# Altium PCB BatteryBoard.PcbDoc
Units mil, origin at the board's own origin, x right, y up, seen from the top; angles counter-clockwise.
Board outline 3745 x 2520 mil, 2 copper layers (Top Layer, Bottom Layer); 15 components, 12 nets, 44 pads, 7 vias.
Unrouted connection lines stored in the file: 1.
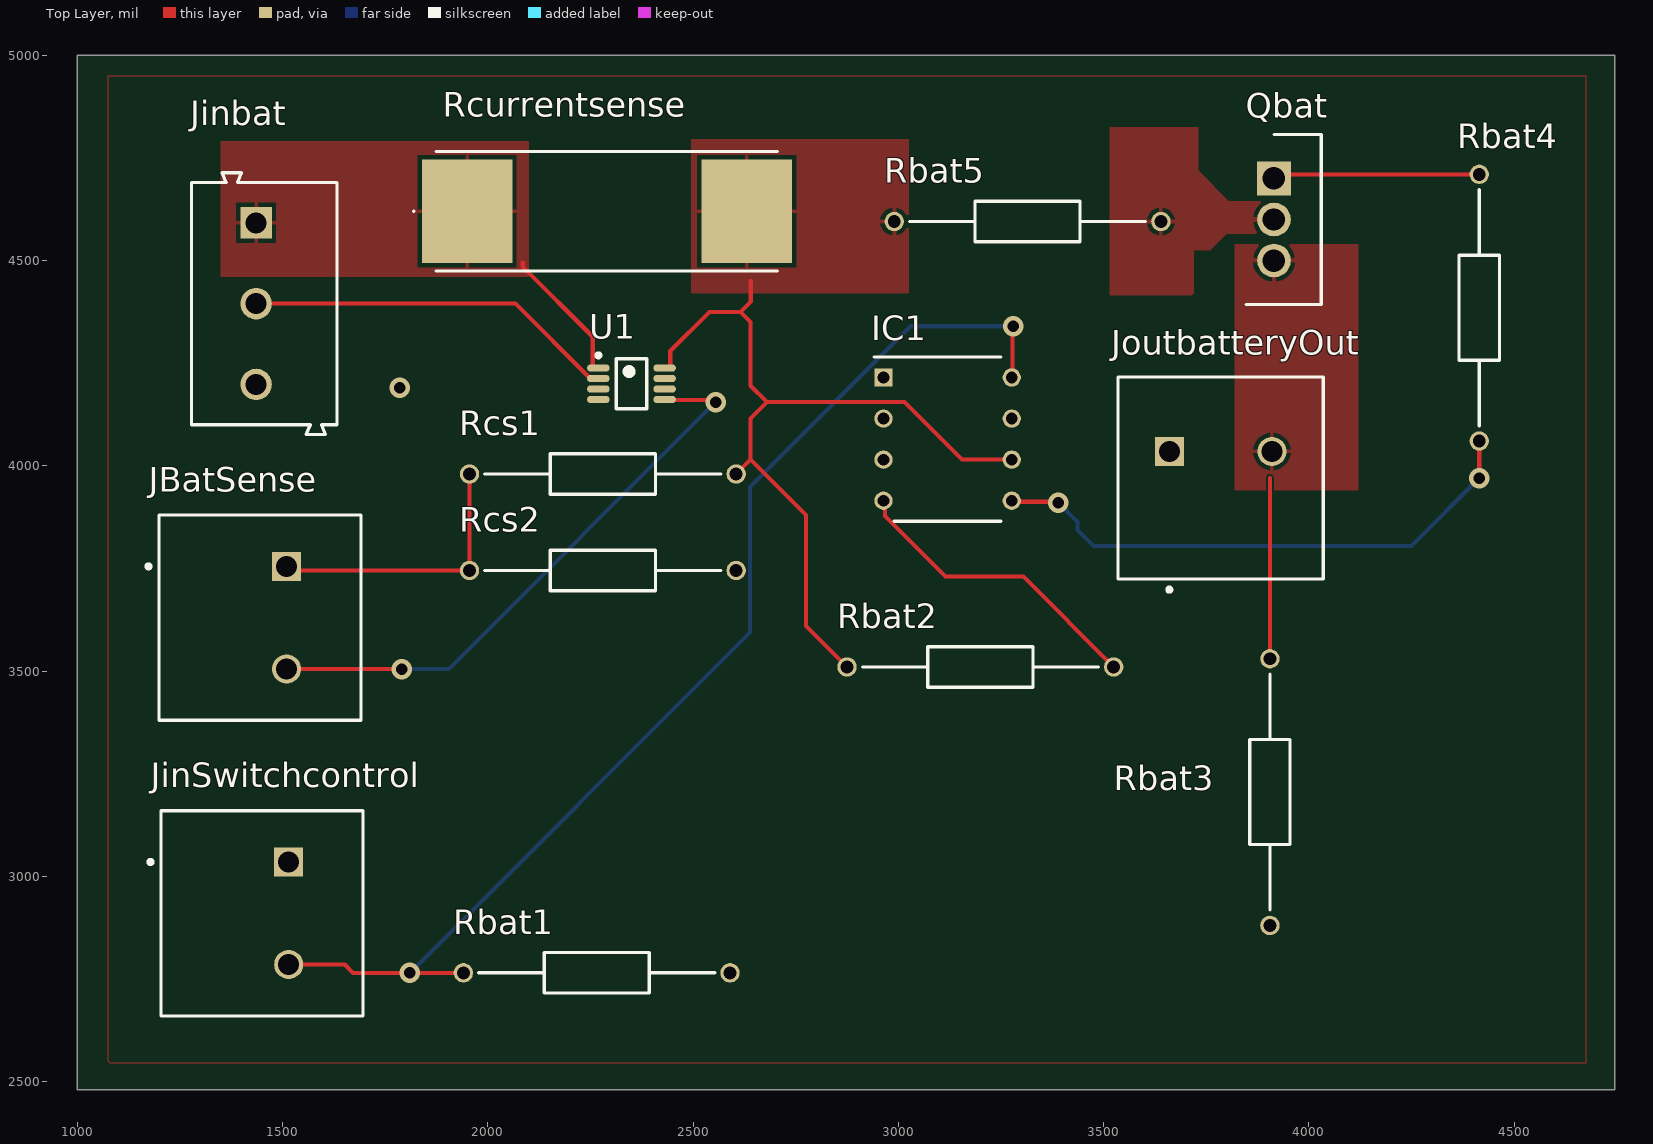
[diagram p0: Top Layer view]
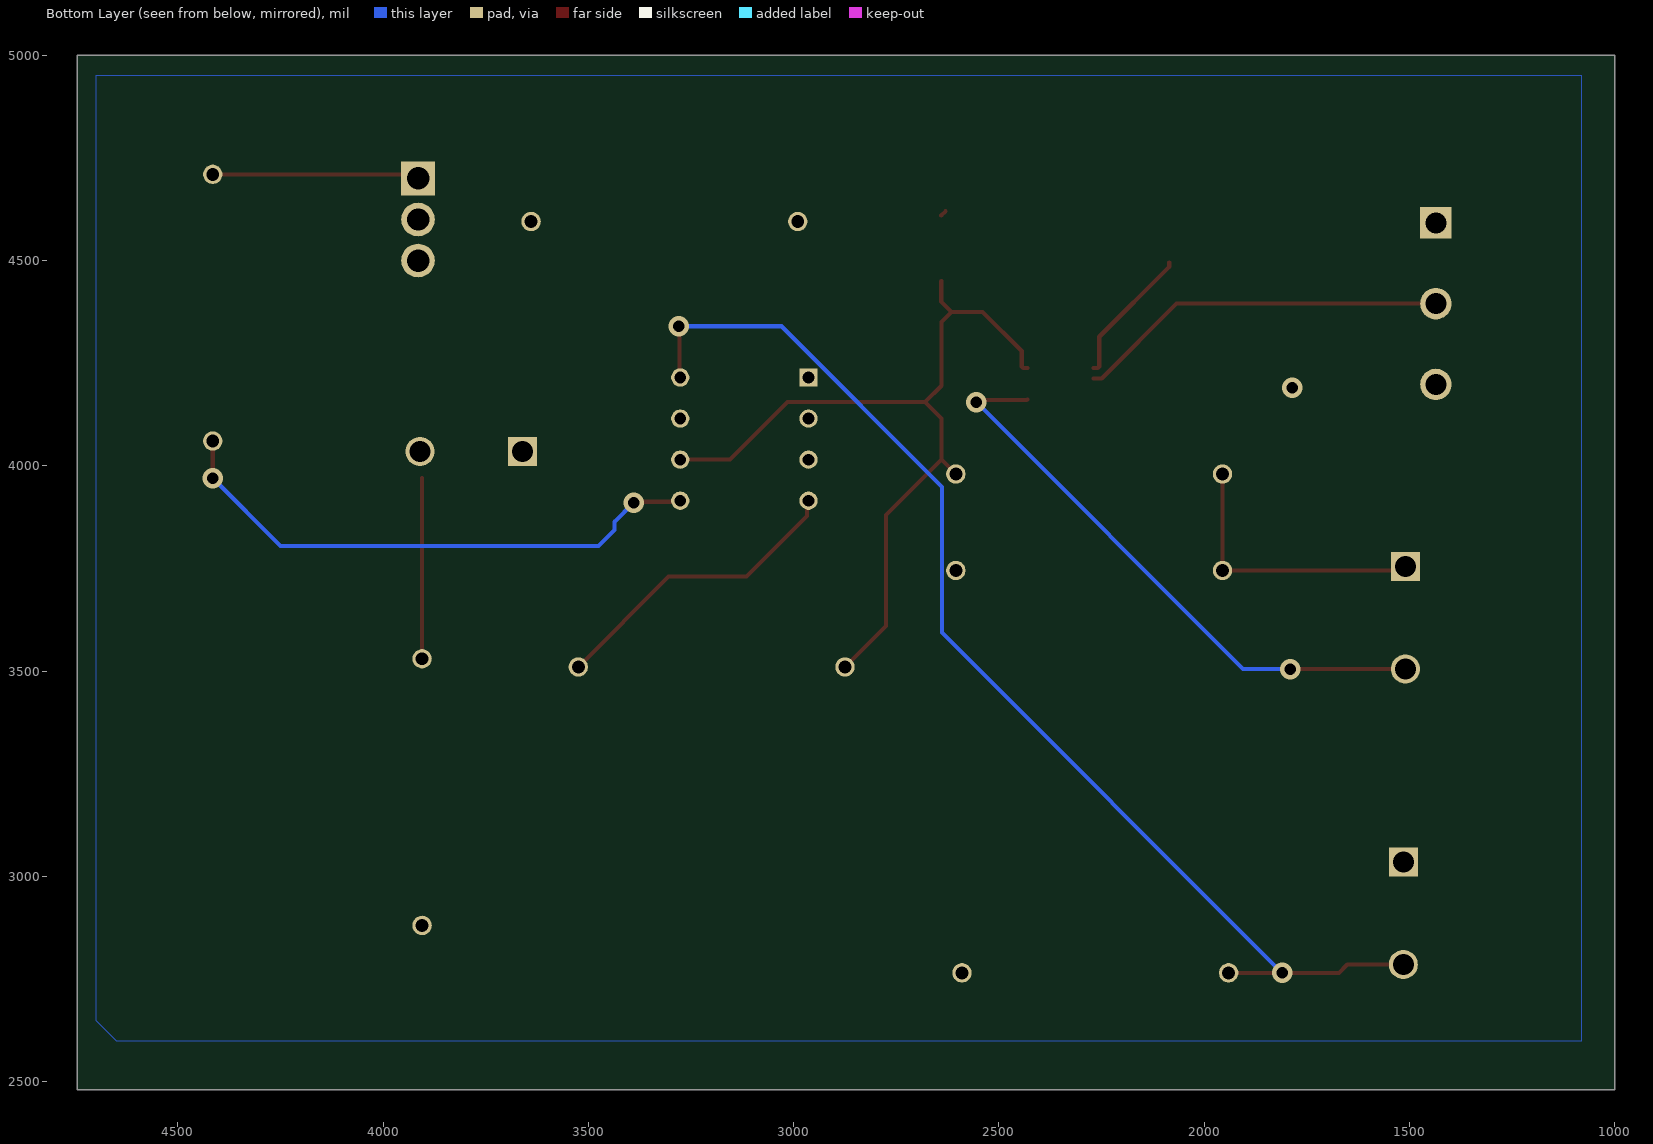
[diagram p1: Bottom Layer view, seen from below]
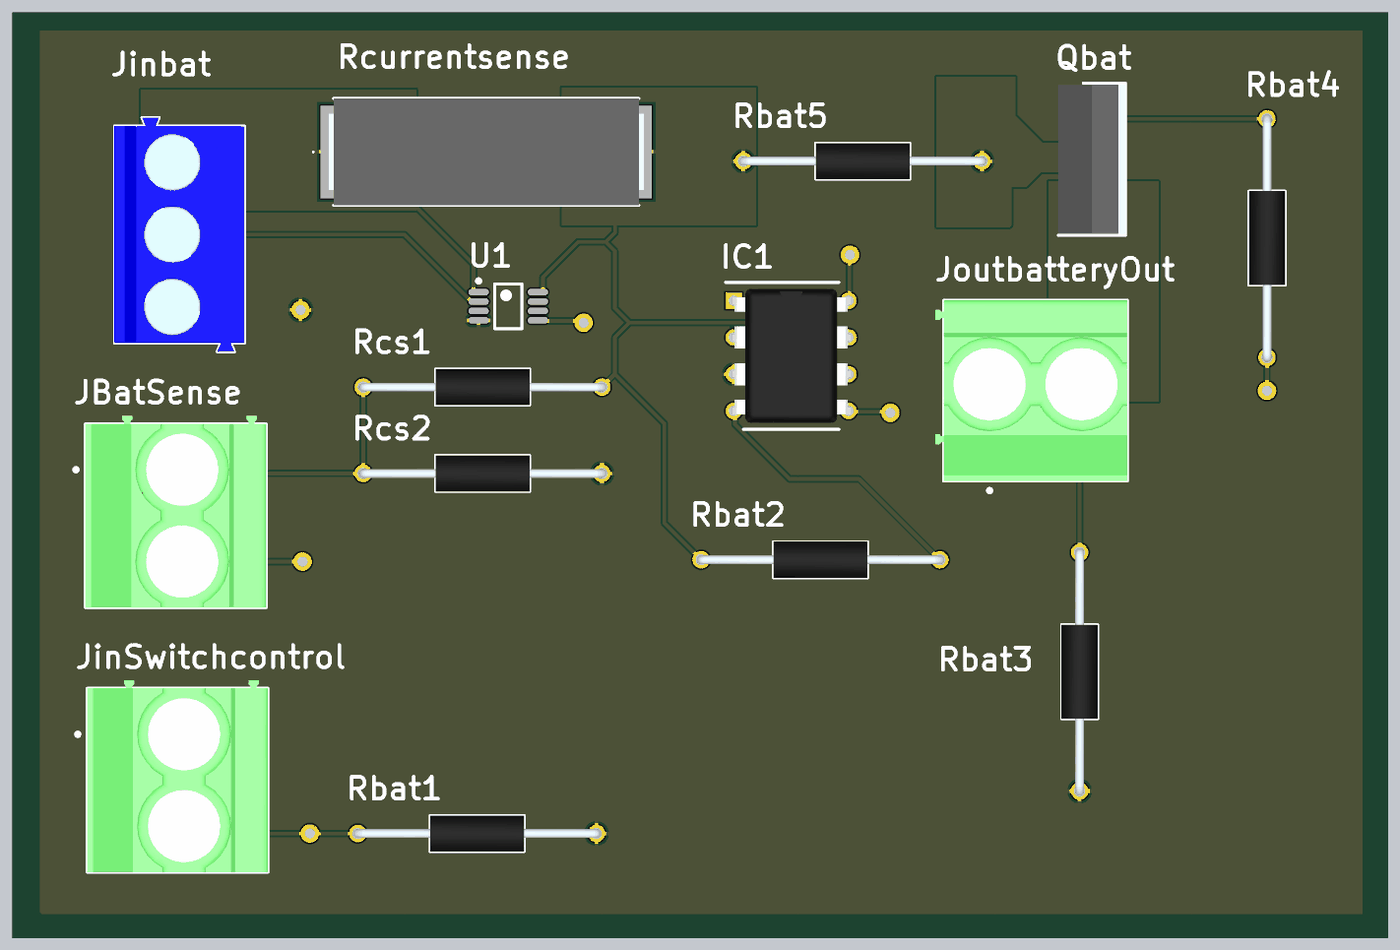
[diagram p2: 3D render of the assembled board from above, using the file's embedded part models]

## Layer stack, top to bottom
Top Solder: solder mask 0.4, Solder Resist, Dk 3.5
Top Layer: signal copper 1.4
Dielectric 1: dielectric 12.6, FR-4, Dk 4.8
Bottom Layer: signal copper 1.4
Bottom Solder: solder mask 0.4, Solder Resist, Dk 3.5

## Board outline
1000,2480 4745,2480 4745,5000 1000,5000

## Design rules (kind name [scope] priority, off if disabled: settings)
Clearance [All] p1: gap=5 ignorepadtopadclearanceinfootprint=FALSE
PolygonConnect [All] p1: connectstyle=Relief reliefconductorwidth=10 reliefentries=4 polygonreliefangle="90 Angle" airgapwidth=10
RoutingVias [All] p1: holewidth=28 width=50 viastyle="Through Hole" minholewidth=28 minwidth=50 maxholewidth=28 maxwidth=50
SolderMaskExpansion [All] p1: expansion=4 istentingtop=FALSE
Width [All] p1: maxlimit=10 minlimit=10 preferedwidth=10
30 further rules are at their usual default settings.

## Components (designator, comment, footprint, x,y, rotation, side; value= is the part's Value field where it differs from the comment)
IC1 "UCC27425P" DIP794W53P254L959H508Q8N 3120,4065 r0 top
JBatSense "1714955" PHOE-1714955_V 1510,3630 r270 top
Jinbat "691101710003" 691101710003 1455.31,4395.01 r270 top
JinSwitchcontrol "1714955" PHOE-1714955_V 1515,2910 r270 top
JoutbatteryOut "1714955" PHOE-1714955_V 3785,4035 r0 top
Qbat "IRLZ14PBF" TO254P465X1031X1954-3P 3915,4700 r270 top
Rbat1 "MRS25000C1002FCT00" RESAD1650W60L650D250 1940.39,2765 r0 top
Rbat2 "MRS25000C1002FCT00" RESAD1650W60L650D250 3524.61,3510 r180 top
Rbat3 "MRS25000C1002FCT00" RESAD1650W60L650D250 3905,2880.39 r90 top
Rbat4 "MRS25000C1002FCT00" RESAD1650W60L650D250 4415,4710 r270 top
Rbat5 "MRS25000C1002FCT00" RESAD1650W60L650D250 2990,4595 r0 top
Rcs1 "MRS25000C1002FCT00" RESAD1650W60L650D250 2605,3980 r180 top
Rcs2 "MRS25000C1002FCT00" RESAD1650W60L650D250 2605,3745 r180 top
Rcurrentsense "SMR4D01" SMR4D01 2290,4620 r0 top
U1 "MAX4080SAUA+T" MAXM-U8+1_L 2350,4200 r0 top

## Footprints (in the part's own frame and the unit in brackets; to place one, negate y for a bottom-side part, rotate by r counter-clockwise, add the part's x,y. Pads: shape width x height; smd on the part's side, far side on the other; paste and mask are expansions set on the pad)
691101710003 [mm] "5,00mm - modular - blue - Horizontal entry with pressure clamp - 12,6mm height - 03p"
  rect 1.95x1.95 hole 1.3: 1(-5,-0.5)
  round 1.95 hole 1.3: 2(0,-0.5) 3(5,-0.5)
  silkscreen extent -8.1,-4.5 8.1,4.5, body extent -8.1,-4.5 8.1,4.5, height 12.65
DIP794W53P254L959H508Q8N [mm]
  rect 1.13x1.13 hole 0.73: 1(-3.97,3.81)
  round 1.13 hole 0.73: 2(-3.97,1.27) 3(-3.97,-1.27) 4(-3.97,-3.81) 5(3.97,-3.81) 6(3.97,-1.27) 7(3.97,1.27) 8(3.97,3.81)
  silkscreen extent -4.53,-5.08 3.3,5.08, body extent -4.1,-4.64 4.1,4.64, height 4.21
MAXM-U8+1_L [mm] "SOP, 8-Leads, Body 3x3mm, Pitch 0.65mm, IPC High Density"
  oval 1.4x0.45 smd: 1(-2.05,0.975) 2(-2.05,0.325) 3(-2.05,-0.325) 4(-2.05,-0.975) 5(2.05,-0.975) 6(2.05,-0.325) 7(2.05,0.325) 8(2.05,0.975)
  silkscreen extent -2.17,-1.55 0.95,1.87, body extent -1.55,-1.55 1.55,1.55, height 1.1
PHOE-1714955_V [mm] "Terminal Block, 2-Leads, Body 12.7x12.5mm, Pitch 6.35mm"
  rect 1.8x1.8 hole 1.3: 1(-3.175,0)
  round 1.8 hole 1.3: 2(3.175,0)
  silkscreen extent -6.35,-8.67 6.35,4.6, body extent -6.92,-7.9 6.35,4.6, height 21.51
RESAD1650W60L650D250 [mm]
  round 1.2 hole 0.8: 1(0,0) 2(16.5,0)
  silkscreen extent 0.95,-1.25 15.55,1.25, body extent -0.3,-1.24 16.8,1.24, height 2.5
SMR4D01 [mm]
  rect 5.6x6.4 smd: 1(-8.65,0) 2(8.65,0)
  silkscreen extent -12,-3.7 10.55,3.7, body extent -10.89,-3.7 10.89,3.7, height 7.3
TO254P465X1031X1954-3P [mm]
  rect 2.085x2.085 hole 1.39: 1(0,0)
  round 2.085 hole 1.39: 2(2.54,0) 3(5.08,0)
  silkscreen extent -2.72,-1.73 7.8,2.92, body extent -2.62,-1.73 7.7,2.92, height 18.67

## Part data
IC1: "Integrated Circuit", Manufacturer_Name="Texas Instruments", Mouser Part Number=595-UCC27425P, Arrow Part Number=UCC27425P, Arrow Price/Stock=https://www.arrow.com/en/products/ucc27425p/texas-instruments?region=nac, Datasheet Link=http://www.ti.com/lit/ds/symlink/ucc27423.pdf, Height=5.08mm, Manufacturer_Part_Number=UCC27425P, Mouser Price/Stock=https://www.mouser.co.uk/ProductDetail/Texas-Instruments/UCC27425P?qs=eJkN62t4xTVuK5uorhoIsw%3D%3D
JBatSense JinSwitchcontrol JoutbatteryOut: library part CMP-2000-05797-1, "PC Terminal Block, Pitch 6.35 mm, 1 x 2 Position, Height 21.5 mm, Tail Lenght 5.1 mm, RoHS, Bulk", Manufacturer="Phoenix Contact", Package Description="PC Terminal Block, Pitch 6.35 mm, 1 x 2 Position, Height 21.5 mm, Tail Lenght 5.1 mm", Datasheet URL=http://media.digikey.com/pdf/Data%20Sheets/Phoenix%20Contact%20PDFs/1714955.pdf, Datasheet Version=02/2010, Manufacturer URL=http://www.phoenixcontact.com/, Mounting Technology=ThroughHole, Package Reference=1714955
Jinbat: library part CMP-1502-03257-1, "Series 101 - 5.00 mm Horizontal Entry Modular with Pressure Clamp WR-TBL, 3 pin", Manufacturer="Wurth Elektronik", Operating Temperature=-40to105degC, Datasheet URL=http://katalog.we-online.de/em/datasheet/6911017100xx.pdf, Manufacturer URL=http://www.we-online.de, Mounting Technology=THT, Package Reference=691101710003, Packaging=Box, Part Number=691101710003, Pin Number=3, Pitch=5.00mm, Publisher=WurthElektronik
Qbat: "Transistor", Manufacturer_Name=Vishay, Mouser Part Number=844-IRLZ14PBF, Arrow Part Number=IRLZ14PBF, Arrow Price/Stock=https://www.arrow.com/en/products/irlz14pbf/vishay?region=europe, Datasheet Link=https://datasheet.datasheetarchive.com/originals/distributors/Datasheets-DGA23/1583879.pdf, Height=4.65mm, Manufacturer_Part_Number=IRLZ14PBF, Mouser Price/Stock=https://www.mouser.co.uk/ProductDetail/Vishay-Semiconductors/IRLZ14PBF?qs=cvaI6ThkwxuEdeJ8YmO4Qg%3D%3D
Rbat1 Rbat2 Rbat3 Rbat4 Rbat5 Rcs1 Rcs2: "Resistor", Manufacturer_Name=Vishay, Mouser Part Number=594-MRS25000C1002FCT, Arrow Part Number=MRS25000C1002FCT00, Arrow Price/Stock=https://www.arrow.com/en/products/mrs25000c1002fct00/vishay?region=nac, Datasheet Link=http://www.vishay.com/docs/28724/mrs16m25.pdf, Manufacturer_Part_Number=MRS25000C1002FCT00, Mouser Price/Stock=https://www.mouser.co.uk/ProductDetail/Vishay-BC-Components/MRS25000C1002FCT00?qs=H30XFsNYD%2FEwip42ZXddDQ%3D%3D
Rcurrentsense: "Resistor", Manufacturer_Name="NTE ELECTRONICS", Datasheet Link=https://www.nteinc.com/resistor_web/pdf/surface_mnt_ww.pdf, Height=7.2mm, Manufacturer_Part_Number=SMR4D01
U1: library part CMP-0252-00376-1, "76 V, High-Side, Uni-directional Current-Sense Amplifier, 60 V / V Gain, -40 to 125 degC, 8-Pin SOP (U8+1), Pb-Free, Tape and Reel", Bi-Dir. Curr. Sense=No, Code_JEDEC=MO-187, ComponentLink1Description="Manufacturer URL", ComponentLink1URL=http://www.maximintegrated.com/, ComponentLink2Description=Datasheet, ComponentLink2URL=http://datasheets.maximintegrated.com/en/ds/MAX4080-MAX4081.pdf, ComponentLink3Description="Package Specification", ComponentLink3URL=http://pdfserv.maximintegrated.com/package_dwgs/21-0036.PDF, DatasheetVersion="Rev. 4", Gain="5 V/V, 20 V/V ,60 V/V", Industry Qualified="Automotive - AECQ100, Automotive - General", Mounting Technology="Surface Mount", PackageDescription="8-Pin Micro-MAX, Thin Shrink Small-Outline (U8+1), Body 3 x 3 mm, Pitch 0.65 mm", PackageReference=U8+1, PackageVersion="Rev. L, 08/2009", PartNumber=MAX4080SAUA+T

## Via types
v1: diameter 50, hole 28, Top Layer to Bottom Layer, 7 vias

## Nets (pads, with @x,y where several pads share a name; then routed paths per layer and width w, separated by ;. In a path a pad name is that pad's centre, name@x,y a point inside that pad or via, vN(x,y) a via of type N, cw(c..) or ccw(c..) an arc to the next point about the centre after c; other vN are vias at no path point)
GND: IC1.3 Jinbat.3 Rbat1.2 Rbat3.1 Rcs2.1 U1.4
  other v1: 1785,4190
NetIC1_4: IC1.4 Rbat2.1 | length 748.4
  Top Layer w10: IC1.4 2967.24,3911.46 2967.24,3877.76 3115,3730 3304.61,3730 Rbat2.1
NetIC1_5: IC1.5 Rbat4.2 | length 1354.7
  Top Layer w10: IC1.5 3278.8,3912.5 3387.5,3912.5 v1(3390,3910) ; v1(4415,3970) Rbat4.2
  Bottom Layer w10: v1(3390,3910) 3436.33,3863.67 3436.33,3843.67 3475,3805 4250,3805 v1(4415,3970)
NetIC1_6: IC1.6 Rbat2.2 Rbat5.1 Rcs1.1 Rcurrentsense.2 U1.8 | length 2072.4
  Top Layer w10: U1.8 2440.84,4238.39 2444.41,4241.95 2444.41,4279.41 2540,4375 2615,4375 ; Rcs1.1 2640,4015 ; Rcurrentsense.2 Rcurrentsense.2@2640.55,4610 ; 2640,4450 2640.55,4449.45 2640.55,4400.55 2615,4375 ; Rbat2.2 2775,3610 2775,3880 2640,4015 ; IC1.6 3155,4015 3015,4155 2680,4155 ; 2615,4375 2640,4350 2640,4195 2680,4155 ; 2640,4015 2640,4115 2680,4155
NetIC1_8: IC1.8 JinSwitchcontrol.2 Rbat1.1 | length 2890.5
  Top Layer w10: JinSwitchcontrol.2 1651.5,2785 1671.5,2765 v1(1810,2765) Rbat1.1 ; IC1.8 3278.15,4216.85 3278.15,4338.15 v1(3280,4340)
  Bottom Layer w10: v1(1810,2765) 2638.62,3593.62 2638.62,3948.55 3030.07,4340 v1(3280,4340)
NetJBatSense_1: JBatSense.1 Rcs1.2 Rcs2.2 | length 684.5
  Top Layer w10: JBatSense.1 1520,3745 Rcs2.2 Rcs1.2
NetJBatSense_2: JBatSense.2 U1.5 | length 1441.3
  Top Layer w10: JBatSense.2 v1(1790,3505) ; U1.5 2432.19,4160.14 2549.86,4160.14 v1(2555,4155)
  Bottom Layer w10: v1(1790,3505) 1905,3505 v1(2555,4155)
NetJinbat_1: Jinbat.1 Rcurrentsense.1 U1.1 | length 338.9
  Top Layer w10: 2085,4495 2085,4485 2255.59,4314.41 2255.59,4241.95 2259.16,4238.39 U1.1
NetJinbat_2: Jinbat.2 U1.2 | length 869.8
  Top Layer w10: 1475,4395 2067.31,4395 2249.51,4212.8 U1.2
NetJoutbatteryOut_2: JoutbatteryOut.2 Qbat.3 Rbat3.2 | length 440
  Top Layer w10: Rbat3.2 3905,3970
NetQbat_1: Qbat.1 Rbat4.1 | length 504.1
  Top Layer w10: Qbat.1 3925,4710 Rbat4.1
NetQbat_2: Qbat.2 Rbat5.2
pads on no net: IC1.1 IC1.2 IC1.7 JinSwitchcontrol.1 JoutbatteryOut.1 U1.3 U1.6 U1.7

## Polygon pours and split planes (outlines as drawn)
GND on Top Layer "NONET_L01_P013" (solid, shelved, pour order 13): 1075,4950 4675,4950 4675,2545 1080,2545 1075,2550
NetIC1_6 on Top Layer "NETIC1_6_L01_P011" (solid, pour order 11): 2495,4795 3025,4795 3025,4420 2495,4420
NetJinbat_1 on Top Layer "NETJINBAT_1_L01_P010" (solid, pour order 10): 1350,4790 2100,4790 2100,4460 2075,4460 1350,4460
NetQbat_2 on Top Layer "NETQBAT_2_L01_P007" (solid, pour order 7): 3975,4645 3805,4645 3730,4720 3730,4825 3515,4825 3515,4415 3715,4415 3720,4420 3720,4525 3760,4525 3800,4565 3975,4565
NetJoutbatteryOut_2 on Top Layer "NETJOUTBATTERYOUT_2_L01_P000" (solid, pour order 0): 3820,4540 4120,4540 4120,3940 3820,3940
GND on Bottom Layer "NONET_L02_P014" (solid, shelved, pour order 14): 1080,4950 4700,4950 4700,2650 4650,2600 1080,2600